# Altium PCB hardware_ProjectFish.PcbDoc
Units mm, origin at the board's own origin, x right, y up, seen from the top; angles counter-clockwise.
Board outline 98.5 x 75.7 mm, 2 copper layers (Top Layer, Bottom Layer); 54 components, 39 nets, 157 pads, 63 vias.
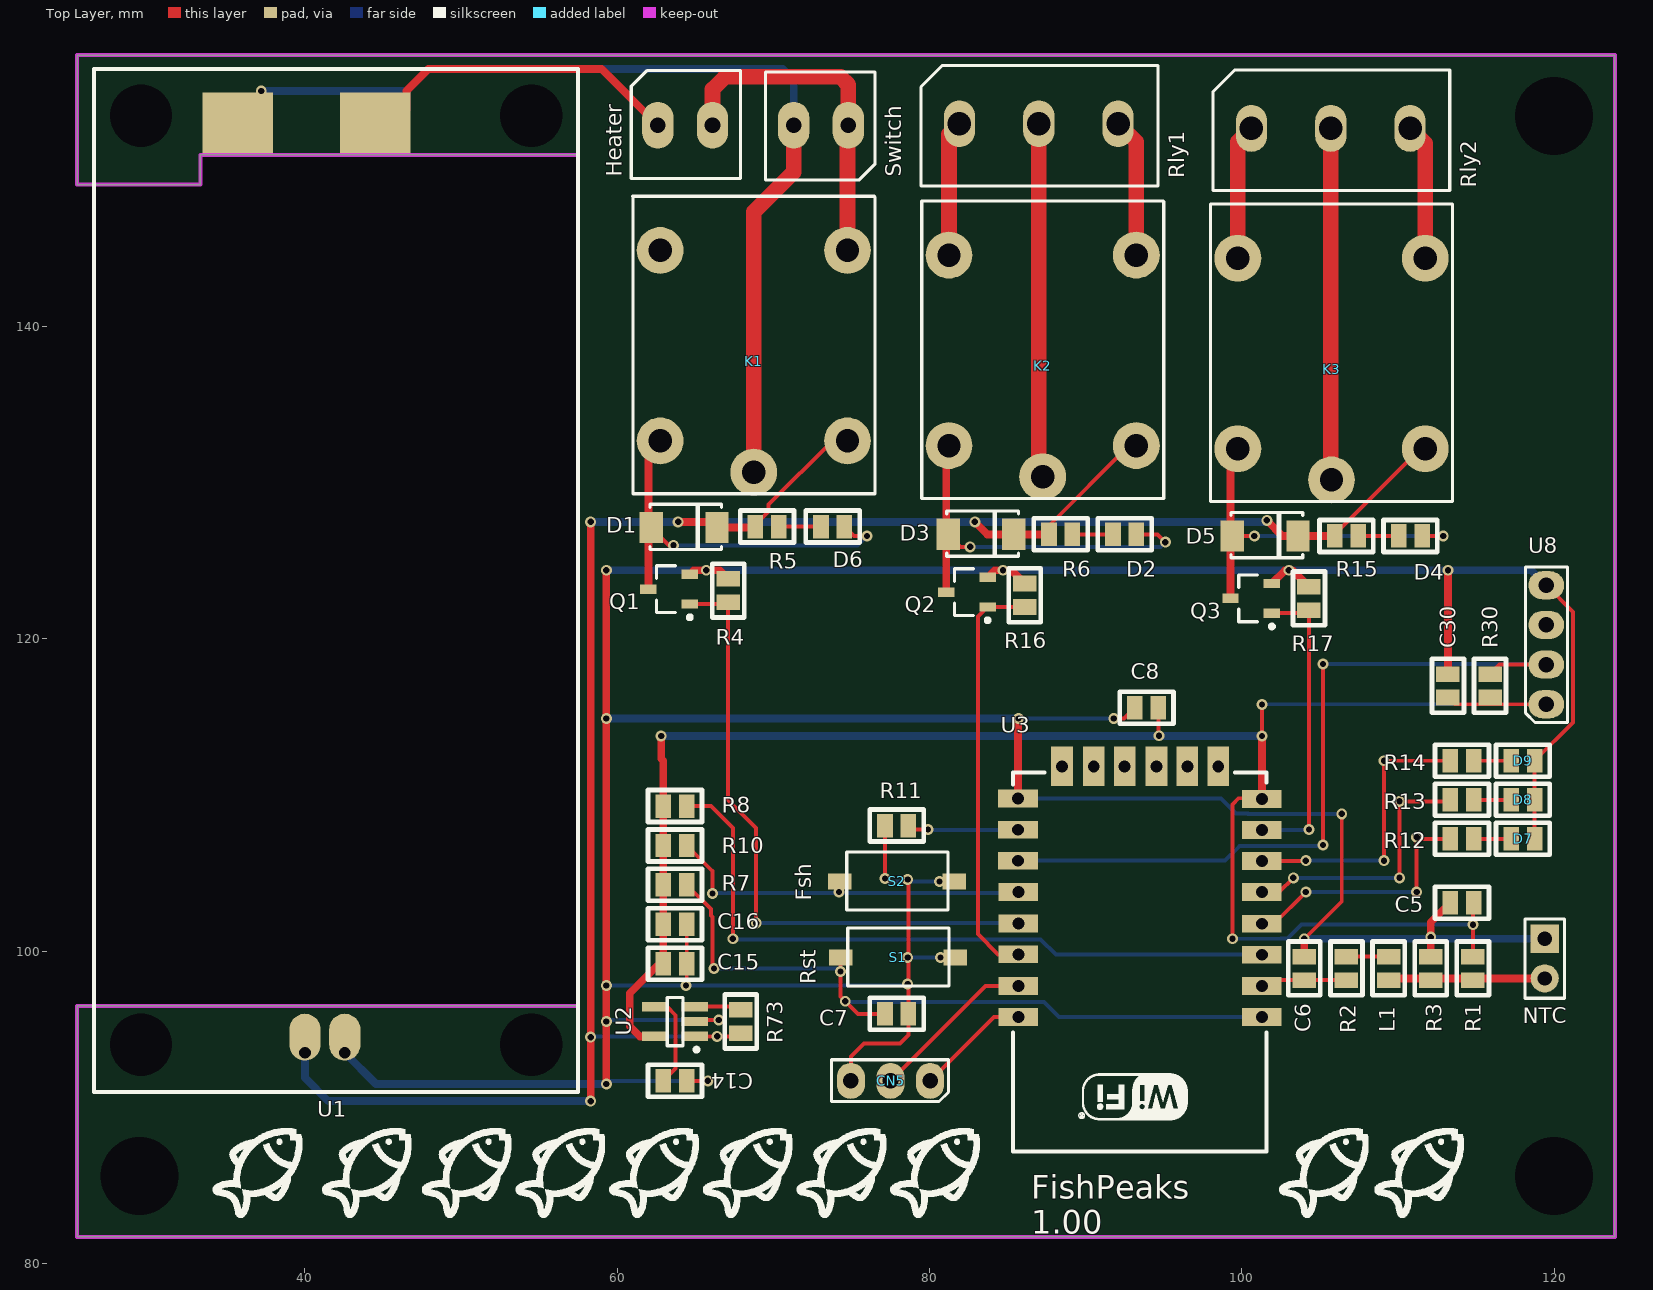
[diagram p0: Top Layer view]
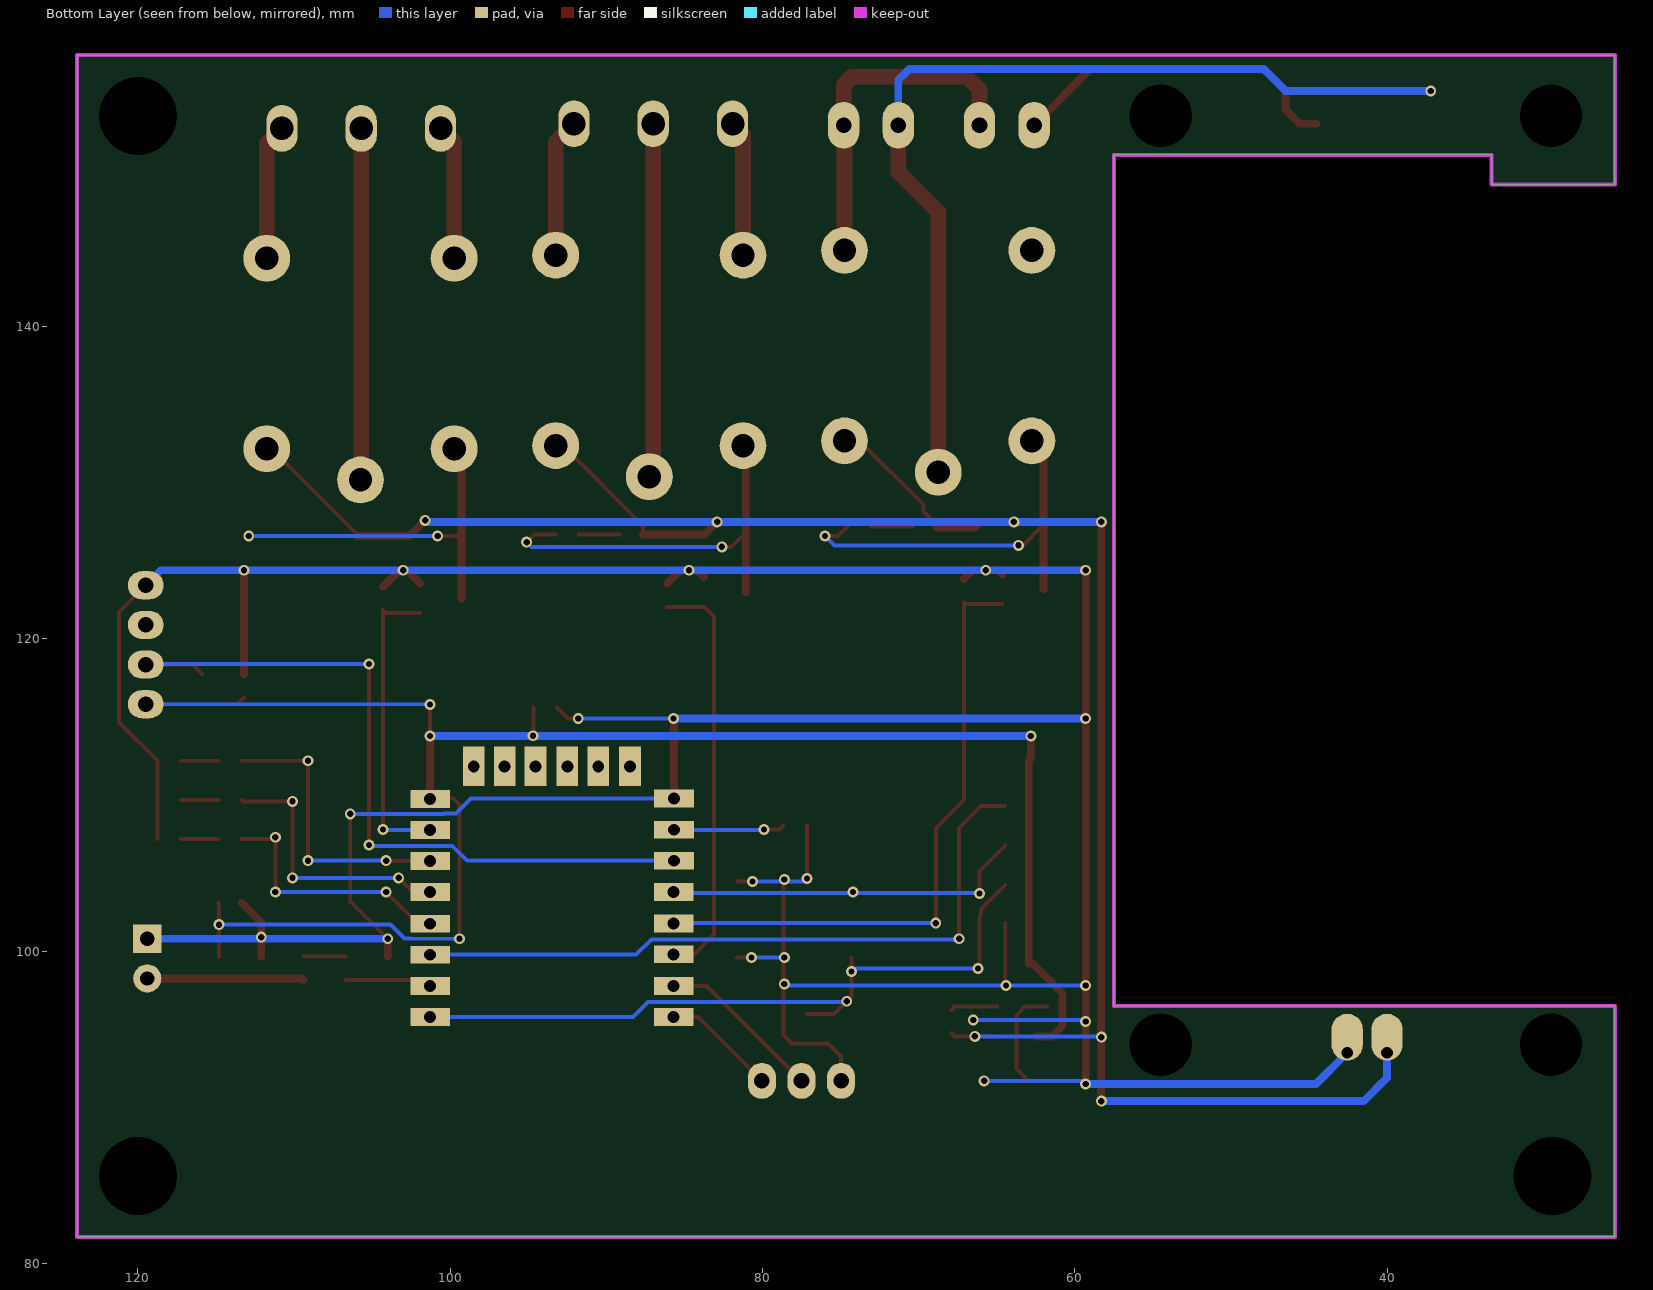
[diagram p1: Bottom Layer view, seen from below]
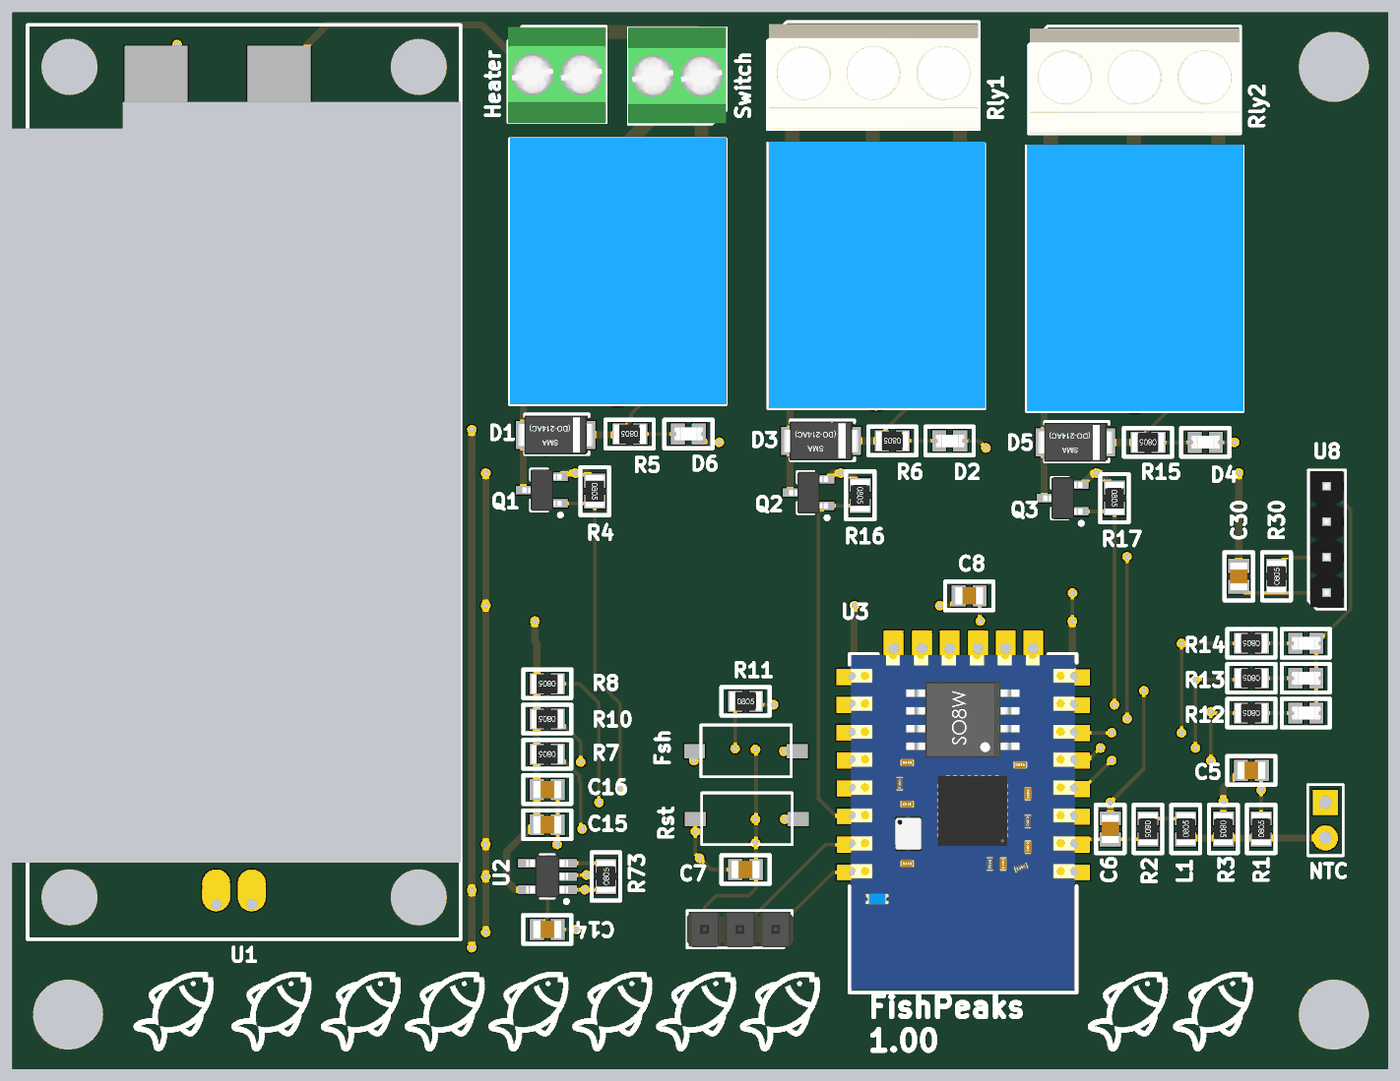
[diagram p2: 3D render of the assembled board from above, using the file's embedded part models]

## Layer stack, top to bottom
Top Solder: solder mask 0.0102, Solder Resist, Dk 3.5
Top Layer: signal copper 0.0356
Dielectric 1: dielectric 0.32, FR-4, Dk 4.8
Bottom Layer: signal copper 0.0356
Bottom Solder: solder mask 0.0102, Solder Resist, Dk 3.5

## Board outline
25.4,81.7 123.9,81.7 123.9,157.4 25.4,157.4 25.4,149.1 33.3,149.1 33.3,151 57.5,151 57.5,96.5 25.4,96.5

## Design rules (kind name [scope] priority, off if disabled: settings)
Clearance [All] p1: gap=0.254
PolygonConnect [All] p1: connectstyle=Relief reliefconductorwidth=0.254 reliefentries=4 polygonreliefangle="90 Angle" airgapwidth=0.254
RoutingVias [All] p1: holewidth=0.711 width=1.27 viastyle="Through Hole" minholewidth=0.711 minwidth=1.27 maxholewidth=0.711 maxwidth=1.27
SolderMaskExpansion [All] p1: expansion=0.102
Width [All] p1: maxlimit=2 minlimit=0.254 preferedwidth=0.254
30 further rules are at their usual default settings.

## Components (designator, comment, footprint, x,y, rotation, side; value= is the part's Value field where it differs from the comment)
C5 "Cap-cer-100nF-50V-0805" "0805 C" 114.1,103.1 r180 top
C6 "Cap-cer-1uF-16V-0805" "0805 C" 104,98.9 r270 top
C7 "Cap-cer-100nF-50V-0805" "0805 C" 77.896,95.993 r180 top
C8 "Cap-cer-100nF-50V-0805" "0805 C" 93.9,115.6 r180 top
C14 "Capacitor1" "0805 C" 63.7,91.7 r180 top
C15 "Capacitor1" "0805 C" 63.7,99.2 r180 top
C16 "Capacitor1" "0805 C" 63.7,101.725 r180 top
C30 "Capacitor1" "0805 C" 113.2,117 r270 top
CN5 "Pin Head 3" "PIN HEAD 3" 77.5,91.7 r180 top
D1 "Diode 1N4007" DO-214AC 64.288,127.131 r0 top
D2 "LED" "0805 LED" 92.5,126.7 r0 top
D3 "Diode 1N4007" DO-214AC 83.3,126.7 r0 top
D4 "LED" "0805 LED" 110.8,126.6 r0 top
D5 "Diode 1N4007" DO-214AC 101.5,126.6 r0 top
D6 "LED" "0805 LED" 73.8,127.2 r0 top
D7 "LED" "0805 LED" 118,107.2 r0 top
D8 "LED" "0805 LED" 118,109.7 r0 top
D9 "LED" "0805 LED" 118,112.2 r0 top
Heater "Pin Head 2" "KRM mini" 64.4,152.9 r0 top
K1 "Relay" Relay 76.5,129.3 r90 top
K2 "Relay" Relay 95,129 r90 top
K3 "Relay" Relay 113.5,128.8 r90 top
L1 "Inductor" "0805 R" 109.4,98.9 r90 top
NTC "Header 2" HDR1X2 119.4,100.8 r270 top
Q1 "BSR202NL6327HTSA1" BSR202NL 63.32,123.186 r180 top
Q2 "BSR202NL6327HTSA1" BSR202NL 82.4,123 r180 top
Q3 "BSR202NL6327HTSA1" BSR202NL 100.6,122.6 r180 top
R1 "Res-18K-0805-1%-1/8W" "0805 R" 114.8,98.9 r90 top
R2 "Res-150K-0805-1%-1/8W" "0805 R" 106.7,98.9 r270 top
R3 "Res-10K-0805-1%-1/8W" "0805 R" 112.1,98.9 r270 top
R4 "Res-10K-0805-1%-1/8W" "0805 R" 67.1,123.1 r270 top
R5 "Res-1K8-0805-1%-1/8W" "0805 R" 69.6,127.2 r180 top
R6 "Res-1K8-0805-1%-1/8W" "0805 R" 88.4,126.7 r180 top
R7 "Res-10K-0805-1%-1/8W" "0805 R" 63.7,104.25 r180 top
R8 "Res-10K-0805-1%-1/8W" "0805 R" 63.7,109.3 r180 top
R10 "Res-10K-0805-1%-1/8W" "0805 R" 63.7,106.775 r180 top
R11 "Res-10K-0805-1%-1/8W" "0805 R" 77.896,108.05 r0 top
R12 "Res-1K5-0805-1%-1/8W" "0805 R" 114.1,107.2 r180 top
R13 "Res-1K5-0805-1%-1/8W" "0805 R" 114.1,109.7 r180 top
R14 "Res-1K5-0805-1%-1/8W" "0805 R" 114.1,112.2 r180 top
R15 "Res-1K8-0805-1%-1/8W" "0805 R" 106.7,126.6 r180 top
R16 "Res-10K-0805-1%-1/8W" "0805 R" 86.1,122.8 r270 top
R17 "Res-10K-0805-1%-1/8W" "0805 R" 104.3,122.6 r270 top
R30 "Resistor1" "0805 R" 115.9,117 r90 top
R73 "Resistor1" "0805 R" 67.9,95.5 r90 top
Rly1 "Pin Head 3" "KRM 3" 87,153 r0 top
Rly2 "Pin Head 3" "KRM 3" 105.7,152.7 r0 top
S1 "Rst" Button_SMD 77.579,99.627 r180 top
S2 "Fsh" Button_SMD 77.515,104.494 r180 top
Switch "Pin Head 2" "KRM mini" 73,152.9 r180 top
U1 "Power Supply" "SANMIM SM-PLF12B" 41.3,123.6 r90 top
U2 "LDK120M33R" SOT-23-5 63.7,95.5 r180 top
U3 "ESP8266 ESP-12-E" "ESP8266 ESP-12-E" 84.7,112.2 r180 top
U8 "DHT_22" "Pin Head 4" 119.5,119.6 r90 top

## Footprints (in the part's own frame and the unit in brackets; to place one, negate y for a bottom-side part, rotate by r counter-clockwise, add the part's x,y. Pads: shape width x height; smd on the part's side, far side on the other; paste and mask are expansions set on the pad)
"0805 C" [mm] "Capacitor"
  rect 1x1.5 smd: 1(-0.75,0) 2(0.75,0)
  silkscreen extent -1.73,-1.02 1.73,1.02, body extent -1,-0.62 1,0.63, height 1
"0805 LED" [mm] "LED"
  rect 1x1.5 smd: 1(-0.75,0) 2(0.75,0)
  silkscreen extent -1.73,-1.02 1.73,1.02, body extent -1,-0.45 1.06,0.46, height 0.85
"0805 R" [mm] "Resistor"
  rect 1x1.5 smd: 1(-0.75,0) 2(0.75,0)
  silkscreen extent -1.73,-1.02 1.73,1.02, body extent -1.15,-0.67 1.15,0.68, height 0.76
BSR202NL [mm] "SOT23, 3-Leads, Body 3,00x2,80mm, Pitch 0,95mm, IPC Medium Density"
  rect 1.05x0.6 smd: 1(-1.325,0.95) 2(-1.325,-0.95) 3(1.325,0)
  silkscreen extent -1.45,-1.5 0.8,1.92, body extent -1.4,-1.5 1.4,1.5, height 1.25
Button_SMD [mm]
  rect 1.5x1 smd: 1(-4.073,0.025) 2(3.277,0.025)
  silkscreen extent -3.66,-1.85 2.82,1.85
DO-214AC [mm]
  rect 1.5x2 smd: 1(-2.1,0) 2(2.1,0)
  silkscreen extent -2.2,-1.4 2.4,1.5, body extent -2.75,-1.4 2.75,1.4, height 2.6
"ESP8266 ESP-12-E" [mil] "ESP8266 ESP-12-E"
  rect 100x45 hole 30: 1(-653,646) 2(-653,568) 3(-653,489) 4(-653,411) 5(-653,331) 6(-653,253) 7(-653,175) 8(-653,96) 15(-38,95) 16(-38,174) 17(-38,252) 18(-39,331) 19(-39,410) 20(-39,488) 21(-39,568) 22(-39,646)
  rect 55x100 hole 30: 9(-543,14) 10(-465,14) 11(-387,14) 12(-307,14) 13(-229,14) 14(-149,14)
  silkscreen extent -665,30 -25,985, body extent -659,32 -30,977
HDR1X2 [mm] "Connector; Header; 2 Position"
  rect 1.8x1.8 hole 0.9: 1(0,0)
  round 1.8 hole 0.9: 2(2.54,0)
  silkscreen extent -1.27,-1.27 3.81,1.27
"KRM 3" [mm]
  oval 2x3 hole 1.5: 1(5.075,0) 2(0,0) 3(-5.085,0)
  silkscreen extent -7.54,-3.99 7.62,3.73, body extent -7.45,-3.94 7.55,3.56, height 10.2
"KRM mini" [mm]
  oval 2x3 hole 1: 1(1.7,0) 2(-1.8,0)
  silkscreen extent -3.5,-3.4 3.5,3.5, body extent -3.5,-3.45 3.5,3.45, height 8.8
"PIN HEAD 3" [mm]
  oval 1.8x2.3 hole 1: 1(-2.54,0) 2(0,0) 3(2.54,0)
  silkscreen extent -3.71,-1.35 3.78,1.32, body extent -3.81,-1.27 3.81,1.27, height 9.5
"Pin Head 4" [mm]
  oval 1.8x2.3 hole 1: 1(-3.78,0) 2(-1.24,0) 3(1.3,0) 4(3.84,0)
  silkscreen extent -4.95,-1.35 5.01,1.32, body extent -4.83,-1.15 4.93,1.19, height 8.13
Relay [mm]
  round 3 hole 1.5: 1(1.385,7.755) 2(15.585,1.755) 3(15.585,13.755) 4(3.385,1.755) 5(3.385,13.755)
  silkscreen extent 0,0 19.05,15.52, body extent 0.04,-0.04 19.14,15.46, height 15.3
"SANMIM SM-PLF12B" [mm] "AC/DC power supply"
  round 1.524 hole 4: 0(-29.6,-13.2) 0(-29.6,11.8) 0(29.9,-13.2) 0(29.9,11.8)
  rect 4x4.5 smd: 1(29.4,5.6) 2(29.4,-3.2)
  oval 3x2 hole 0.762 copper offset 1,0: 3(-30.1,-1.25) 4(-30.1,1.3)
  silkscreen extent -32.6,-16.2 32.9,14.8, body extent -27,-16 29.2,14.8, height 18
SOT-23-5 [mm] "SOT23, 5-Leads, Body 2,92x2,80mm, Pitch 0,95mm, IPC Medium Density"
  rect 1.7x0.6 smd: 1(-1.27,0.95) 2(-1.27,0) 3(-1.27,-0.95) 4(1.27,-0.95) 5(1.27,0.95)
  silkscreen extent -1.5,-1.55 0.5,1.92, body extent -1.5,-1.53 1.5,1.53, height 1.45

## Part data
C5 C7 C8: "Capacitor, ceramic, 100nF, 50V, 0805"
C6: "Capacitor, ceramic, 1uF, 16V, 0805"
C14 C15 C16 C30: "Capacitor (Semiconductor SIM Model)"
D1 D3 D5: "1 Amp General Purpose Rectifier"
NTC: "Header, 2-Pin"
Q1 Q2 Q3: library part MOSFET-N, "N-Channel MOSFET"
R1: "Resistor, 18K, 0805, 1%, 1/8W"
R2: "Resistor, 150K, 0805, 1%, 1/8W"
R3 R4 R7 R8 R10 R11 R16 R17: "Resistor, 10K, 0805, 1%, 1/8W"
R5 R6 R15: "Resistor, 1K8, 0805, 1%, 1/8W"
R12 R13 R14: "Resistor, 1K,5 0805, 1%, 1/8W"
R30 R73: "Resistor"
S1 S2: library part SW-PB, "Switch NA"
U1: library part "SANMIM SM-PLF12B", "AC/DC switch 5V@2A power supply"
U2: "Voltage Regulator"

## Free pads (board coordinates)
  round 1.524 hole 5: 0(29.4,85.6) 0(120,85.6) 0(120,153.5)

## Via types
v1: diameter 0.7, hole 0.4, Top Layer to Bottom Layer, 63 vias

## Nets (pads, with @x,y where several pads share a name; then routed paths per layer and width w, separated by ;. In a path a pad name is that pad's centre, name@x,y a point inside that pad or via, vN(x,y) a via of type N, cw(c..) or ccw(c..) an arc to the next point about the centre after c; other vN are vias at no path point)
3V3: C5.1 C8.1 C15.2 C16.2 C30.2 R1.2 R7.2 R8.2 R10.2 R30.1 U2.5 U3.8 U8.1 | length 122.5
  Top Layer w0.254: C8.1 94.65,113.85 v1(94.7,113.8) ; v1(99.4,100.8) 99.4,109.4 99.8,109.8 101.248,109.8 U3.8 ; v1@101.3,113.8 v1(101.3,115.8) ; C30.2 113.63,115.82 U8.1 ; R1.2 114.8,103.05 C5.1
  Top Layer w0.5: U2.5 61.45,94.55 60.8,95.2 60.8,97.3 62.7,99.2 C15.2 62.95,101.8 62.95,104.4 62.95,112.2 62.814,112.336 v1(62.814,113.786) ; U3.8 v1(101.286,113.786) v1@101.3,113.8
  Bottom Layer w0.254: v1(99.4,100.8) 102.5,100.8 102.508,100.808 102.937,100.808 103.829,101.7 v1(114.8,101.7) ; v1(101.3,115.8) 101.32,115.82 U8.1
  Bottom Layer w0.5: v1(62.814,113.786) v1(101.286,113.786)
5V: D1.2 D3.2 D5.2 K1.4 K2.4 K3.4 R5.2 R6.2 R15.2 R73.1 U1.4 U2.1 | length 152
  Top Layer w0.254: U2.1 v1(66.4,94.55) 67.7,94.55 R73.1 ; R5.2 68.85,127.32 69.7,128.17 69.7,128.6 73.785,132.685 K1.4 ; R6.2 87.65,127.25 92.785,132.385 K2.4 ; R15.2 105.95,126.689 111.446,132.185 K3.4
  Top Layer w0.5: v1(58.3,90.4) v1(58.3,94.5) v1(58.3,127.5) ; v1(63.9,127.5) 66.019,127.5 D1.2 68.781,127.131 R5.2 ; v1(82.9,127.5) 83.7,126.7 D3.2 R6.2 ; v1(101.6,127.6) 102.6,126.6 D5.2 R15.2
  Bottom Layer w0.254: v1(58.3,94.5) 58.35,94.55 v1(66.4,94.55)
  Bottom Layer w0.5: U1.4 40,91.9 41.5,90.4 v1(58.3,90.4) ; v1(58.3,127.5) v1(63.9,127.5) v1(82.9,127.5) 101.5,127.5 v1(101.6,127.6)
ADC: C6.2 R2.2 U3.2 | length 5.6
  Top Layer w0.254: U3.2 101.663,98.15 C6.2 R2.2
B_LED: R14.2 U3.6 | length 18.5
  Top Layer w0.254: U3.6 104.074,105.774 v1(104.1,105.8) ; v1(109.1,105.8) v1(109.1,112.2) R14.2
  Bottom Layer w0.254: v1(104.1,105.8) v1(109.1,105.8)
DHT: R30.2 U3.17 U8.2 | length 49.7
  Top Layer w0.254: v1(105.2,106.8) v1(105.2,118.4) ; R30.2 116.51,118.36 U8.2
  Bottom Layer w0.254: U3.17 98.931,105.799 99.858,106.726 105.126,106.726 v1(105.2,106.8) ; v1(105.2,118.4) 119.46,118.4 U8.2
G_LED: R13.2 U3.5 | length 17.4
  Top Layer w0.254: U3.5 102.393,103.793 v1(103.3,104.7) ; v1(110.1,104.7) v1(110.1,109.6) 113.25,109.6 R13.2
  Bottom Layer w0.254: v1(103.3,104.7) v1(110.1,104.7)
GND: C5.2 C6.1 C7.1 C8.2 C14.1 C15.1 C16.1 C30.1 CN5.3 D7.2 D8.2 D9.2 NTC.1 Q1.2 Q2.2 Q3.2 R3.1 R4.1 R11.1 R16.1 R17.1 S1.1 S2.1 U1.3 U2.2 U3.15 U8.4 | length 300.8
  Top Layer w0.254: v1(64.4,97.8) 64.45,97.85 C15.1 C16.1@64.45,101.8 ; C14.1 v1(65.8,91.7) ; U2.2@64.97,95.6 v1(66.5,95.6) ; CN5.3 74.96,93.26 75.8,94.1 78.1,94.1 78.646,94.646 C7.1 78.646,104.554 v1(78.6,104.6) ; R11.1 v1(77.146,104.654) v1@77.2,104.6 ; v1(80.631,104.469) S2.1 S2.1@81.557,104.5 ; v1(80.699,99.601) S1.1 ; v1(91.8,114.9) 92.45,114.9 C8.2 ; v1(104,100.8) 106.4,103.2 v1(106.4,108.8) ; D7.2 D8.2 D9.2 121.2,114.65 121.2,121.74 U8.4
  Top Layer w0.5: v1(59.3,91.496) v1(59.3,95.5) v1(59.3,97.8) v1(59.3,124.4) ; Q1.2 64.909,124.4 v1(65.7,124.4) 66.55,124.4 R4.1 ; Q2.2 84.175,124.4 85.25,124.4 R16.1 ; U3.15 85.665,114.865 v1(85.7,114.9) ; Q3.2 v1@102.775,124.4 ; v1@103.25,124.4 R17.1 ; C6.1 v1(104,100.8) ; R3.1 112.1,101.85 C5.2 ; C30.1 v1(113.2,124.4)
  Bottom Layer w0.254: v1(59.3,91.496) 59.504,91.7 v1(65.8,91.7) ; v1(59.3,95.5) 59.4,95.6 v1(66.5,95.6) ; v1(59.3,97.8) v1(64.4,97.8) 78.5,97.8 v1(78.6,97.9) ; v1@77.331,104.469 v1(80.631,104.469) ; v1(78.6,99.6) v1(78.6,99.6) v1(80.699,99.601) ; U3.15 98.657,109.787 99.635,108.809 100.391,108.809 100.4,108.8 v1(106.4,108.8) ; v1(85.7,114.9) v1(91.8,114.9)
  Bottom Layer w0.5: U1.3 44.554,91.496 v1(59.3,91.496) ; v1(59.3,114.9) v1(85.7,114.9) ; v1(59.3,124.4) v1(65.7,124.4) v1(84.713,124.4) v1(103.013,124.4) v1(113.2,124.4) 118.54,124.4 U8.4 ; v1(104,100.8) 112,100.8 v1(112.1,100.9) 112.2,100.8 NTC.1
NetC7_2: C7.2 R7.1 S1.2 U3.1 | length 47.3
  Top Layer w0.254: R7.1 66,102.7 66,102.3 66.1,102.2 v1@66.1,98.7 ; S1.2 74.303,97.097 75.407,95.993 C7.2
  Bottom Layer w0.254: v1(66.2,98.9) 74.1,98.9 v1(74.3,98.7) ; v1(74.6,96.8) 74.656,96.744 87.342,96.744 88.294,95.792 U3.1
NetC14_2: C14.2 U2.4 | length 6.7
  Top Layer w0.254: U2.4@61.75,96.45 U2.4 63.189,96.45 63.739,95.9 63.739,92.489 C14.2
NetD1_1: D1.1 D6.2 K1.5 Q1.3 | length 26
  Top Layer w0.254: K1.5@61.995,131.935 K1.5 ; D1.1 63.319,126 v1(63.6,126) ; D6.2 75.15,126.6 v1(76,126.6)
  Top Layer w0.5: Q1.3 K1.5@61.995,131.935
  Bottom Layer w0.254: v1(63.6,126) 75.4,126 v1(76,126.6)
NetD2_1: D2.1 R6.1 | length 2.6
  Top Layer w0.254: R6.1 D2.1
NetD2_2: D2.2 D3.1 K2.5 Q2.3 | length 25.6
  Top Layer w0.254: D3.1 82,125.9 v1(82.6,125.9) ; D2.2 94.6,126.7 v1(95.1,126.2)
  Top Layer w0.5: Q2.3 K2.5@81.075,132.215
  Bottom Layer w0.254: v1(82.6,125.9) 94.8,125.9 v1(95.1,126.2)
NetD4_1: D4.1 R15.1 | length 2.6
  Top Layer w0.254: R15.1 D4.1
NetD4_2: D4.2 D5.1 K3.5 Q3.3 | length 24.6
  Top Layer w0.254: D5.1 v1(100.8,126.6) ; D4.2 v1(112.9,126.6)
  Top Layer w0.5: Q3.3 99.275,131.715 K3.5
  Bottom Layer w0.254: v1(100.8,126.6) v1(112.9,126.6)
NetD6_1: D6.1 R5.1 | length 2.7
  Top Layer w0.254: R5.1 D6.1
NetD7_1: D7.1 R12.1 | length 2.4
  Top Layer w0.254: R12.1 D7.1
NetD8_1: D8.1 R13.1 | length 2.4
  Top Layer w0.254: R13.1 D8.1
NetD9_1: D9.1 R14.1 | length 2.4
  Top Layer w0.254: R14.1 D9.1
NetHeater_1: Heater.1 K1.2 Switch.2 | length 22.2
  Top Layer w1: Heater.1 66.1,155.2 66.9,156 74.3,156 74.8,155.5 Switch.2 74.745,152.845 K1.2
NetK2_1: K2.1 Rly1.2 | length 22.4
  Top Layer w1: K2.1@87,130.63 Rly1.2
NetK2_2: K2.2 Rly1.1 | length 8.9
  Top Layer w1: Rly1.1 93.245,151.83 K2.2
NetK2_3: K2.3 Rly1.3 | length 7.7
  Top Layer w1: K2.3 Rly1.3@81.245,152.33
NetK3_1: K3.1 Rly2.2 | length 22.5
  Top Layer w1: Rly2.2 105.7,130.23 K3.1
NetK3_2: K3.2 Rly2.1 | length 8.7
  Top Layer w1: Rly2.1 111.745,151.73 K3.2
NetK3_3: K3.3 Rly2.3 | length 8.7
  Top Layer w1: K3.3 99.745,151.83 Rly2.3
NetL1_2: L1.2 R2.1 | length 2.7
  Top Layer w0.254: R2.1 L1.2
NetR8_1: R8.1 U3.3 | length 44.9
  Top Layer w0.254: R8.1 66,109.3 67.4,107.9 v1(67.4,100.8)
  Bottom Layer w0.254: v1(67.4,100.8) 67.443,100.757 87.118,100.757 88.096,99.779 U3.3
NetR10_1: R10.1 S2.2 U3.18 | length 23.4
  Top Layer w0.254: R10.1 66.1,105.125 v1(66.1,103.7)
  Bottom Layer w0.254: v1(66.1,103.7) 66.138,103.738 85.691,103.738 U3.18
  other v1: 74.2,103.8
NetR11_2: R11.2 U3.16 | length 7.1
  Top Layer w0.254: R11.2 78.896,107.8 v1(79.9,107.8)
  Bottom Layer w0.254: v1(79.9,107.8) 79.92,107.78 U3.16
NetR73_2: R73.2 U2.3 | length 3
  Top Layer w0.254: U2.3 67.7,96.45 R73.2
NTC: L1.1 NTC.2 R1.1 R3.2 | length 10
  Top Layer w0.5: L1.1 109.51,98.26 NTC.2
R_LED: R12.2 U3.4 | length 16.4
  Top Layer w0.254: U3.4 102.061,101.761 v1(104.1,103.8) ; v1(111.2,103.8) v1(111.2,107.3) 111.3,107.2 R12.2
  Bottom Layer w0.254: v1(104.1,103.8) v1(111.2,103.8)
RELAY_0: Q1.1 R4.2 U3.19 | length 40.6
  Top Layer w0.254: Q1.1 66.986,122.236 R4.2 67.1,109.7 68.9,107.9 v1(68.9,101.8)
  Bottom Layer w0.254: v1(68.9,101.8) 85.677,101.8 U3.19
RELAY_1: Q2.1 R16.2 U3.20 | length 26.7
  Top Layer w0.254: U3.20 84.395,99.805 83.1,101.1 83.1,121.425 Q2.1 R16.2
RELAY_2: Q3.1 R17.2 U3.7 | length 19.5
  Top Layer w0.254: Q3.1 104.1,121.65 R17.2 v1(104.3,107.8)
  Bottom Layer w0.254: U3.7 104.255,107.755 v1(104.3,107.8)
UART_RXD: CN5.2 U3.21 | length 10.7
  Top Layer w0.254: CN5.2 83.573,97.773 U3.21
UART_TXD: CN5.1 U3.22 | length 7.3
  Top Layer w0.254: CN5.1 84.132,95.792 U3.22
VAC+: K1.1 Switch.1 U1.1 | length 61.1
  Top Layer w1: K1.1 68.745,147.345 71.3,149.9 Switch.1
  Bottom Layer w0.5: v1(37.2,155.1) 46.5,155.1 47.9,156.5 70.6,156.5 71.3,155.8 Switch.1
VAC-: Heater.2 U1.2 | length 21.7
  Top Layer w0.5: U1.2 45.6,153 46.5,153.9 46.5,155.1 47.9,156.5 59,156.5 Heater.2
pads on no net: K1.3 U1.0 U3.9 U3.10 U3.11 U3.12 U3.13 U3.14 U8.3

## Keep-outs
Keep-Out Layer:
  the board outline again, w0.254

## Silkscreen, mask and mechanical layers (free items; w line width, h text height)
Top Overlay:
  drawing of 5540 lines, arcs and shapes, not listed
  text "FishPeaks / 1.00" at 86.5,81.9 h1.5

## Text inside footprints (layer, text, board x,y; h text height)
U3: Mechanical 13 "ANTENNA AREA" at 101.285,87.801 h0.25 r180; Mechanical 13 "CUTOUT POLYGON" at 101.285,88.309 h0.25 r180